# Altium PCB PCB1.PcbDoc
Units mm, origin at the board's own origin, x right, y up, seen from the top; angles counter-clockwise.
Board outline 30 x 60 mm, 4 copper layers (Top Layer, Layer 1, Layer 2, Bottom Layer), stack 1.588 mm thick; 62 components, 60 nets, 254 pads, 463 vias.
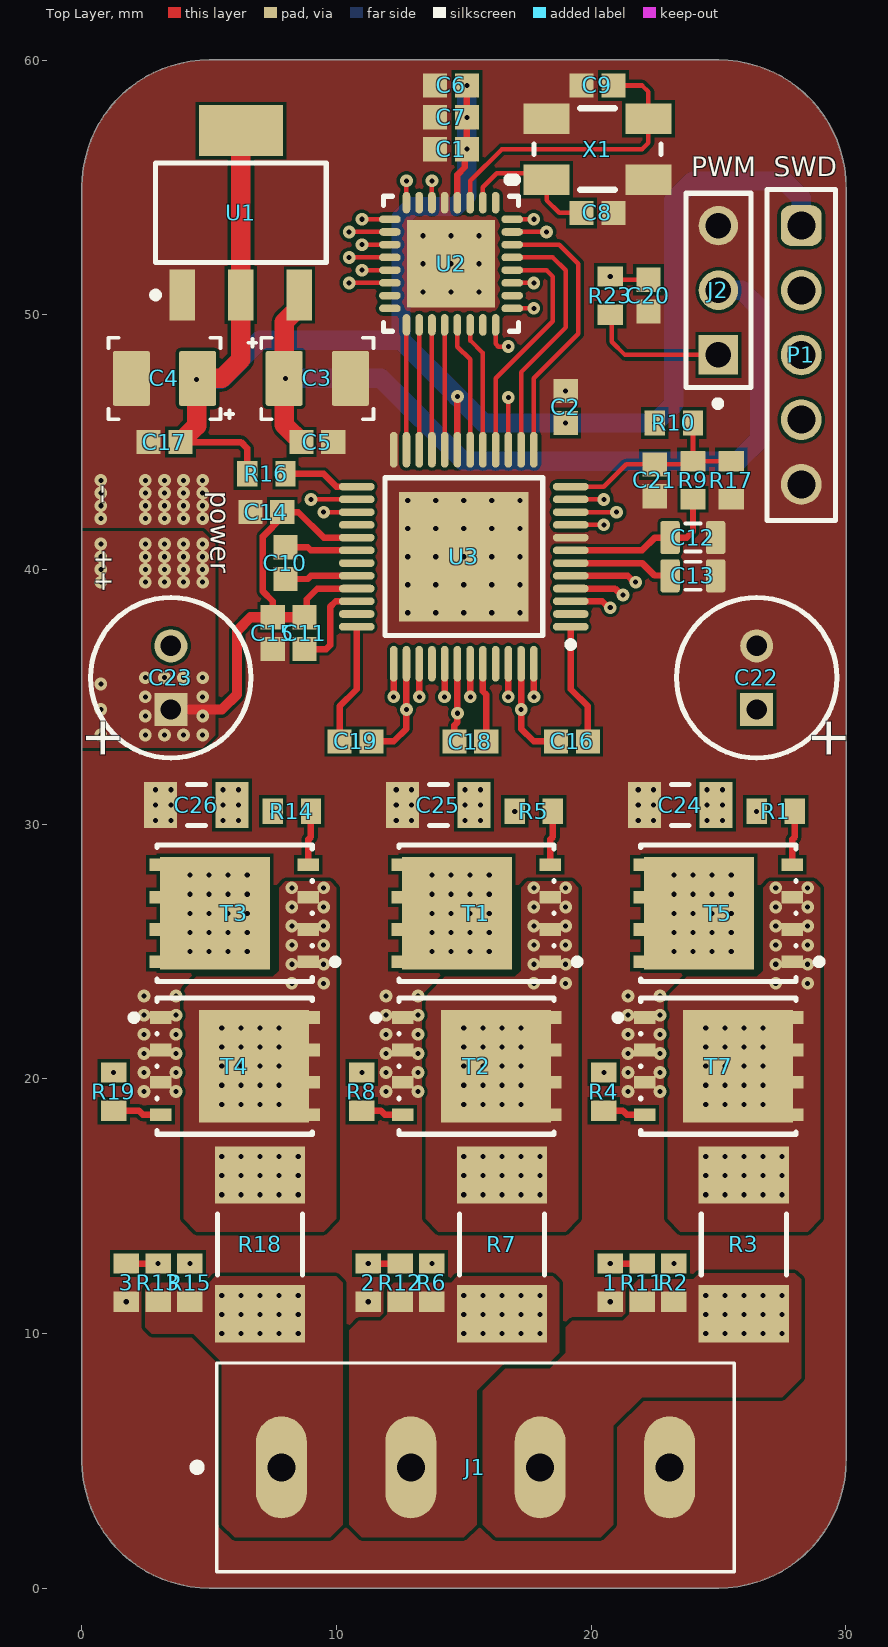
[diagram p0: Top Layer view]
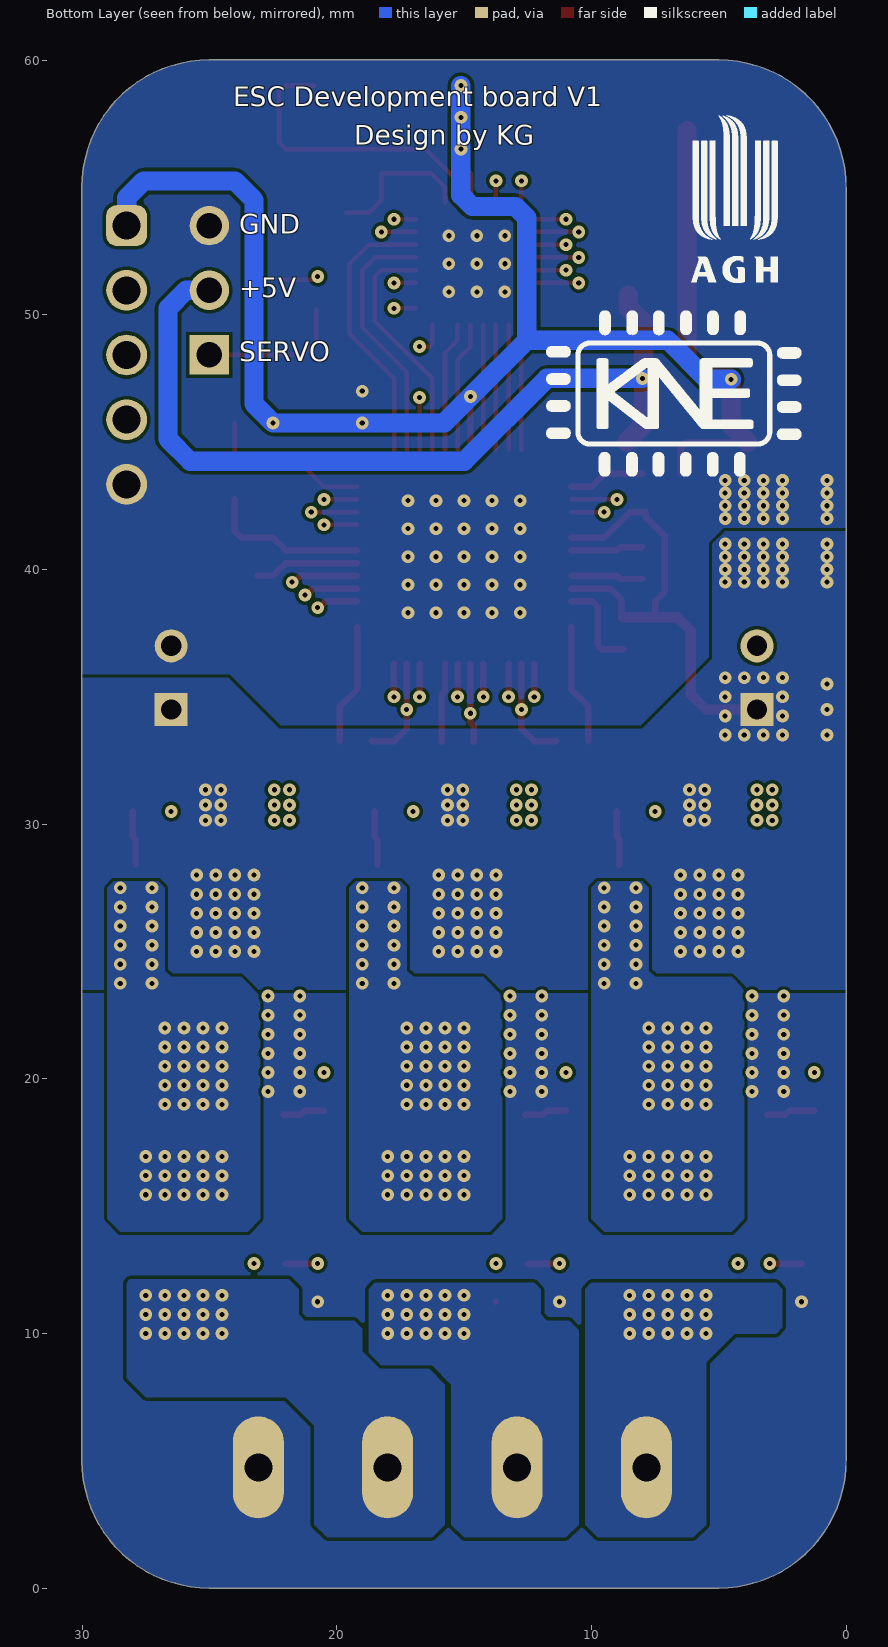
[diagram p1: Bottom Layer view, seen from below]
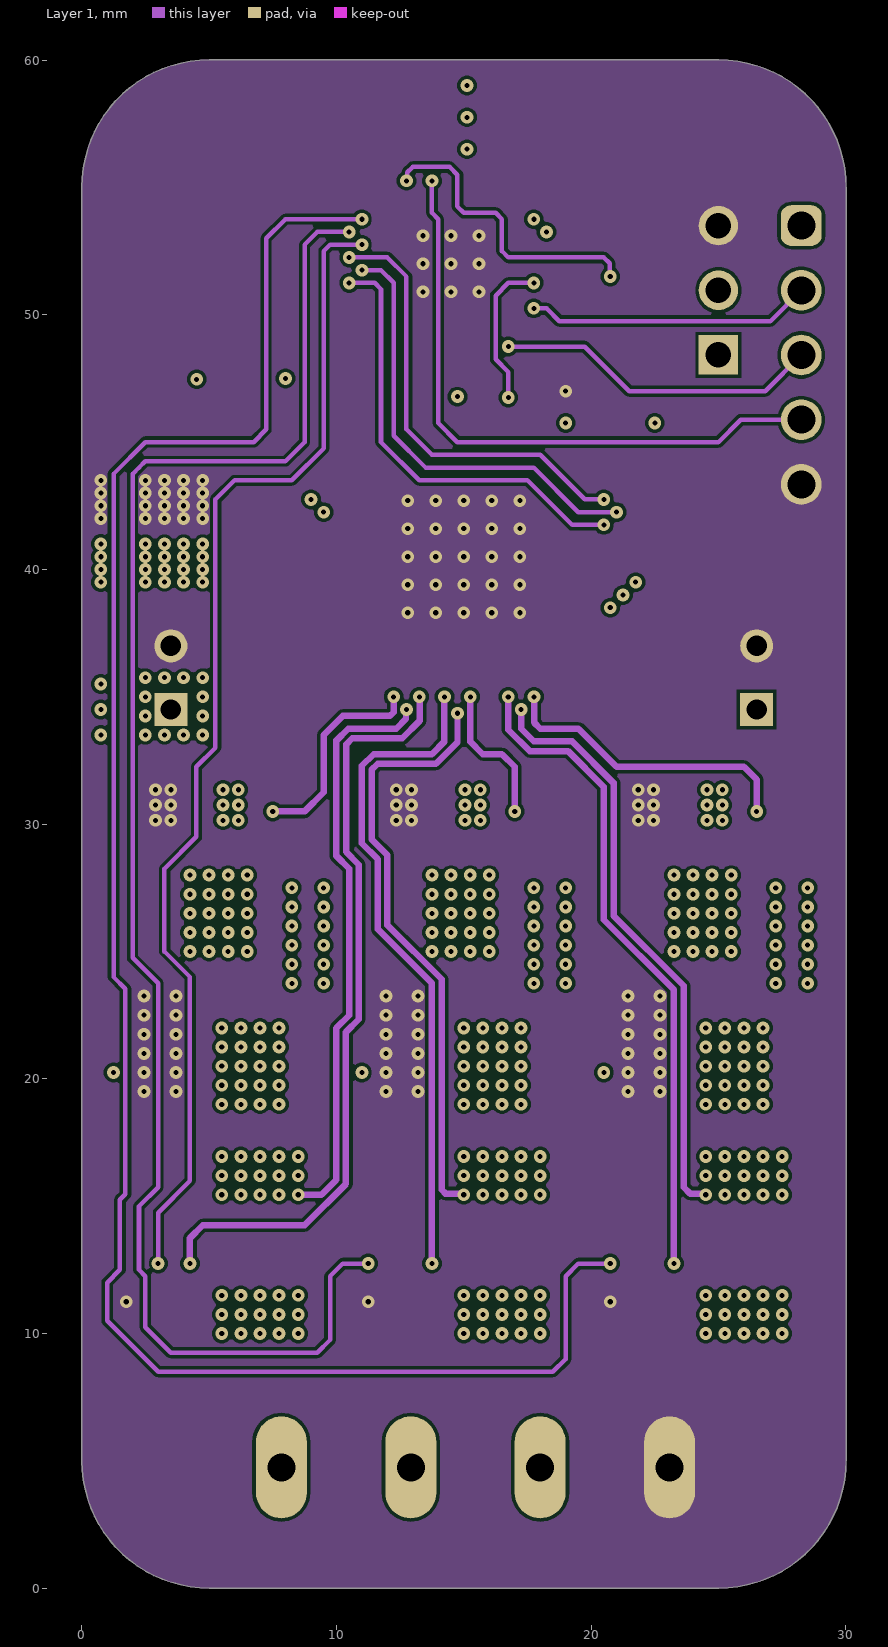
[diagram p2: Layer 1]
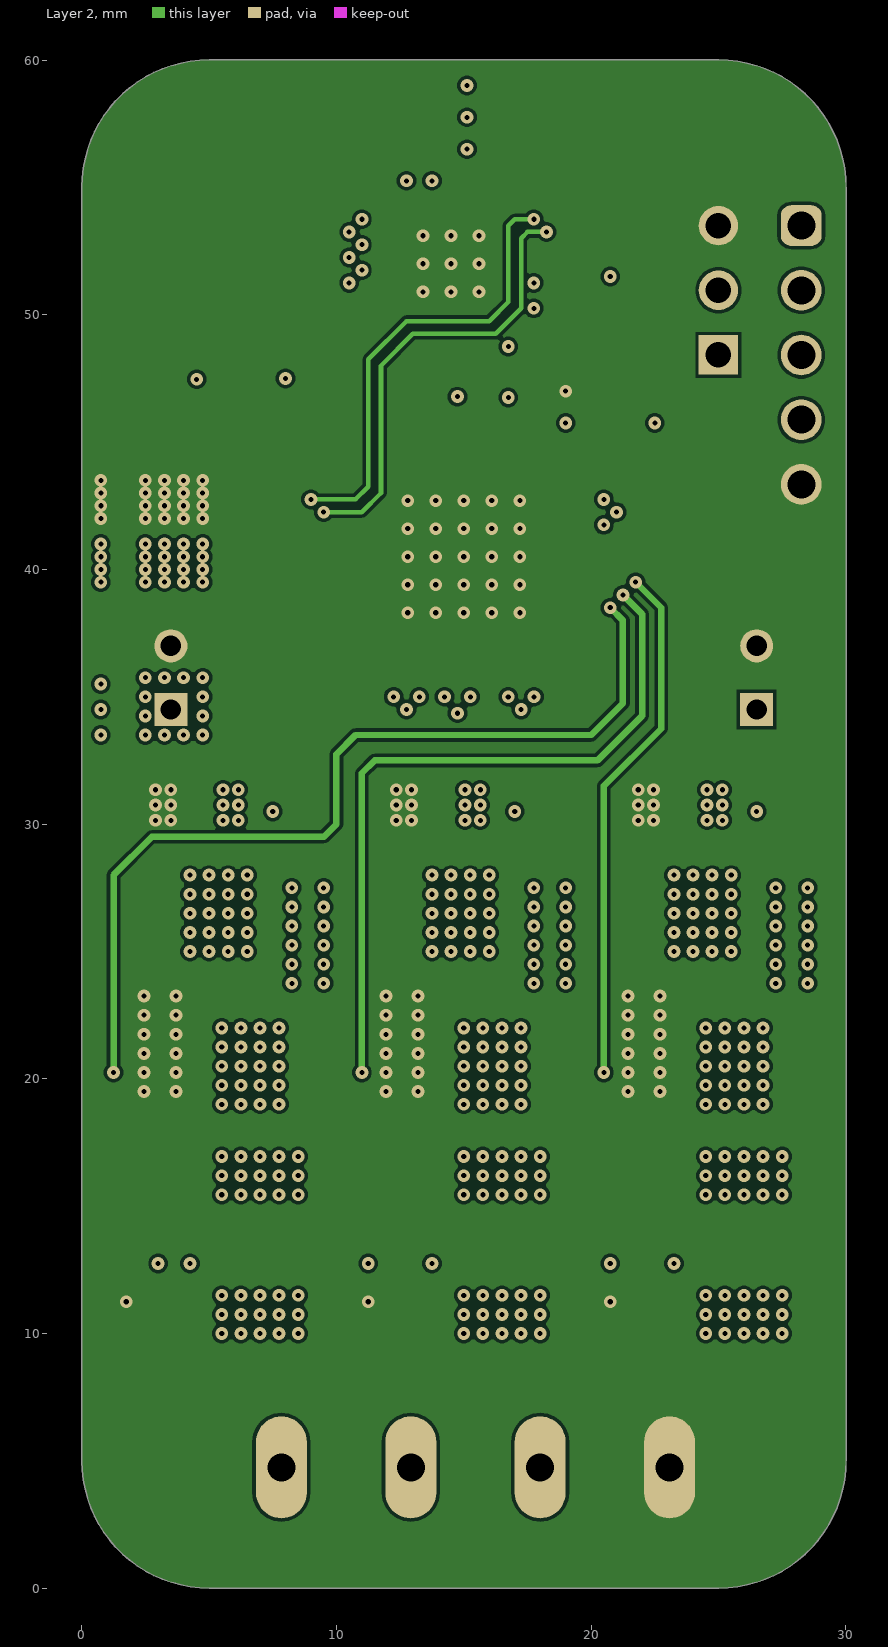
[diagram p3: Layer 2]
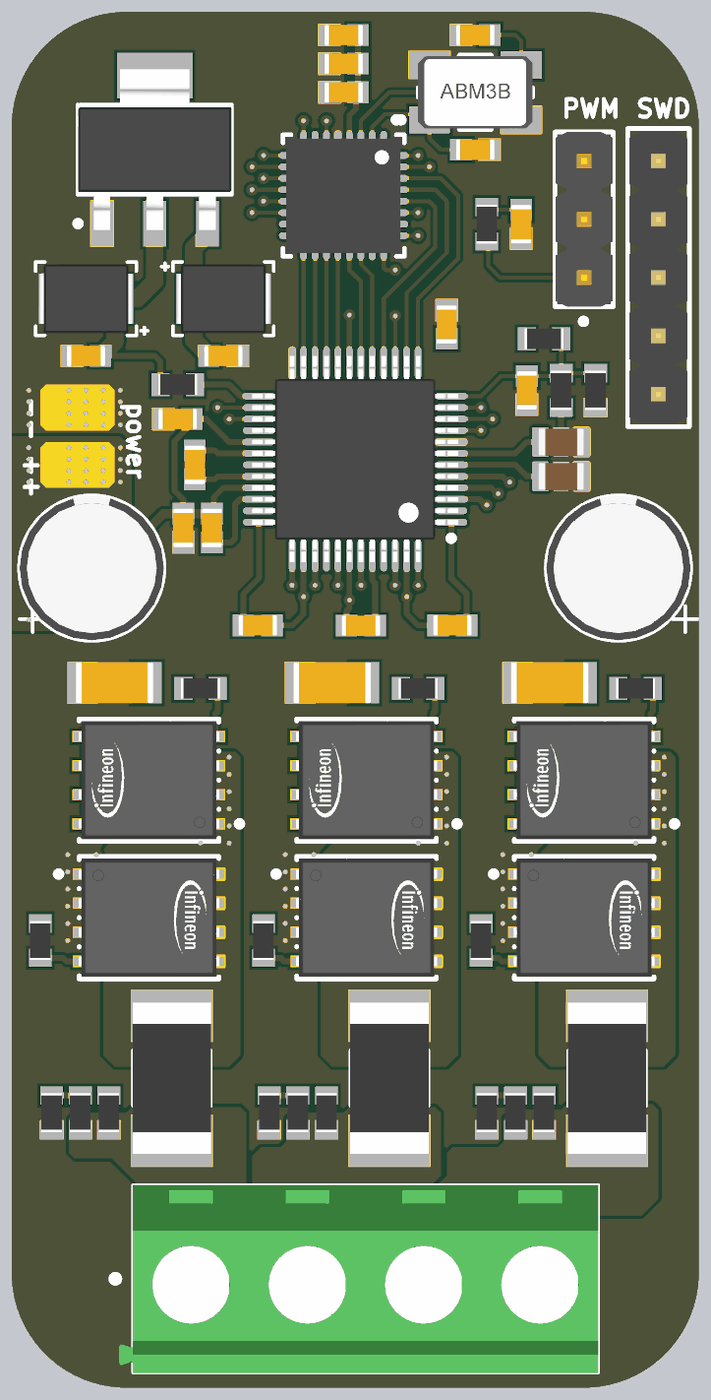
[diagram p4: 3D render of the assembled board from above, using the file's embedded part models]

## Layer stack, top to bottom
Top Solder: solder mask 0.0102, Solder Resist, Dk 3.5
Top Layer: signal copper 0.0356
Dielectric 2: prepreg 0.2083, PP-022, Dk 4.5
Layer 1: signal copper 0.0175
Dielectric 1: dielectric 1.065, FR-4, Dk 4.8
Layer 2: signal copper 0.0175
Dielectric 3: prepreg 0.2083, PP-022, Dk 4.5
Bottom Layer: signal copper 0.0356
Bottom Solder: solder mask 0.0102, Solder Resist, Dk 3.5

## Board outline
0.006,5.006 0.006,55.006 cw(c5.006,55.006) 5.006,60.006 25.006,60.006 cw(c25.006,55.006) 30.006,55.006 30.006,5.006 cw(c25.006,5.006) 25.006,0.006 5.006,0.006 cw(c5.006,5.006)

## Design rules (kind name [scope] priority, off if disabled: settings)
Clearance [All] p1: gap=0.127 ignorepadtopadclearanceinfootprint=TRUE
MinimumSolderMaskSliver [All] p1: minsoldermaskwidth=0.127
PlaneConnect [All] p1: planeconnectstyle=Direct reliefexpansion=0.508 reliefentries=4 reliefconductorwidth=0.254 reliefairgap=0.254
PolygonConnect [All] p1: connectstyle=Direct reliefconductorwidth=0.254 reliefentries=4 polygonreliefangle="90 Angle" airgapwidth=0.254
RoutingVias [All] p1: holewidth=0.711 width=1.27 viastyle="Through Hole" minholewidth=0.711 minwidth=1.27 maxholewidth=0.711 maxwidth=1.27
SilkToSilkClearance [All] p1: silktosilkclearance=0.127
SilkToSolderMaskClearance [IsPad] p1: minsilkscreentomaskgap=0.051 clearancetoexposedcopper=TRUE
SolderMaskExpansion SolderMaskExpansion_1 [isVia] p1: expansion=0.102 istentingtop=TRUE
SolderMaskExpansion [All] p2: expansion=0.025 istentingtop=FALSE
Width [All] p1: maxlimit=2.54 minlimit=0.127 preferedwidth=0.254
26 further rules are at their usual default settings.

## Classes and differential pairs
component class "Mosfet driver": 1 2 3 C10 C11 C12 C13 C14 C15 C16 C17 C18 C19 C21 C22 C23 C24 C25 C26 J1 R1 R2 R3 R4 R5 R6 R7 R8 R9 R10 R11 R12 R13 R14 R15 R16 R17 R18 R19 T1 T2 T3 T4 T5 T7 U3
component class MCU: C1 C2 C3 C4 C5 C6 C7 C8 C9 C20 J2 P1 R23 U1 U2 X1

## Components (designator, comment, footprint, x,y, rotation, side; value= is the part's Value field where it differs from the comment)
1 "R0603" RESC1608X04M 20.75,12 r90 top value=2k2
2 "R0603" RESC1608X04M 11.25,12 r90 top value=2k2
3 "R0603" RESC1608X04M 1.75,12 r90 top value=2k2
C1 "Capacitor 100 nF +/-10% 50 V 0603" CAPC1608X90X40NL10T20 14.5,56.5 r0 top value=2.2uF
C2 "Capacitor 100 nF +/-10% 50 V 0603" CAPC1608X90X40NL10T20 19,46.375 r270 top value=100nF
C3 "Capacitor 150µF +/-20% 6.3V B2" PNSC-6TPE150MAZB_L 9.25,47.5 r0 top value=100µF
C4 "Capacitor 150µF +/-20% 6.3V B2" PNSC-6TPE150MAZB_L 3.25,47.5 r180 top value=100µF
C5 "Capacitor 100 nF +/-10% 50 V 0603" CAPC1608X90X40NL10T20 9.25,45 r180 top value=2.2uF
C6 "Capacitor 100 nF +/-10% 50 V 0603" CAPC1608X90X40NL10T20 14.5,59 r0 top value=2.2uF
C7 "Capacitor 100 nF +/-10% 50 V 0603" CAPC1608X90X40NL10T20 14.5,57.75 r0 top value=10nF
C8 "Capacitor 100 nF +/-10% 50 V 0603" CAPC1608X90X40NL10T20 20.25,54 r0 top value=10pf
C9 "Capacitor 100 nF +/-10% 50 V 0603" CAPC1608X90X40NL10T20 20.25,59 r180 top value=10pf
C10 "Capacitor 100 nF +/-10% 50 V 0603" CAPC1608X90X40NL10T20 8,40.25 r90 top value=100nF
C11 "Capacitor 100 nF +/-10% 50 V 0603" CAPC1608X90X40NL10T20 8.75,37.5 r270 top value=100nF
C12 "Capacitor 22µF +/-40% 16V 0805" CAPC0805(2012)145_L 24,41.25 r0 top value=2.2µF
C13 "Capacitor 22µF +/-40% 16V 0805" CAPC0805(2012)145_L 24,39.75 r0 top value=2.2µF
C14 "Capacitor 100 nF +/-10% 50 V 0603" CAPC1608X90X40NL10T20 7.25,42.25 r0 top value=100nF
C15 "Capacitor 100 nF +/-10% 50 V 0603" CAPC1608X90X40NL10T20 7.5,37.5 r90 top value=100nF
C16 "Capacitor 100 nF +/-10% 50 V 0603" CAPC1608X90X40NL10T20 19.25,33.25 r0 top value=100nF
C17 "Capacitor 100 nF +/-10% 50 V 0603" CAPC1608X90X40NL10T20 3.25,45 r0 top value=100nF
C18 "Capacitor 100 nF +/-10% 50 V 0603" CAPC1608X90X40NL10T20 15.258,33.242 r0 top value=100nF
C19 "Capacitor 100 nF +/-10% 50 V 0603" CAPC1608X90X40NL10T20 10.75,33.25 r180 top value=100nF
C20 "Capacitor 100 nF +/-10% 50 V 0603" CAPC1608X90X40NL10T20 22.25,50.75 r90 top value=100nF
C21 "Capacitor 100 nF +/-10% 50 V 0603" CAPC1608X90X40NL10T20 22.5,43.5 r90 top value=100nF
C22 "ECA-1HM470" CAPPR55-250-1120X630X1220 26.5,35.75 r90 top value=220µF
C23 "ECA-1HM470" CAPPR55-250-1120X630X1220 3.5,35.75 r90 top value=220µF
C24 "Capacitor 10 uF +/- 10% 16 V 1206" CAPC3216X180X50NL20T25 23.5,30.75 r0 top value=10µF
C25 "Capacitor 10 uF +/- 10% 16 V 1206" CAPC3216X180X50NL20T25 14,30.75 r0 top value=10µF
C26 "Capacitor 10 uF +/- 10% 16 V 1206" CAPC3216X180X50NL20T25 4.5,30.75 r0 top value=10µF
J1 "282837-4" TE_282837-4 7.84,4.75 r0 top
J2 "90120-0763" FP-90120-0763-MFG 25,50.96 r90 top
P1 "61300511121" 61300511121 28.25,48.42 r270 top
R1 "R0603" RESC1608X04M 27.25,30.5 r0 top value=2r2
R2 "R0603" RESC1608X04M 23.25,12 r90 top value=10r
R3 "R2512" RESC6432X06M 26,13.5 r90 top value=0r01
R4 "R0603" RESC1608X04M 20.5,19.5 r270 top value=2r2
R5 "R0603" RESC1608X04M 17.75,30.5 r0 top value=2r2
R6 "R0603" RESC1608X04M 13.75,12 r90 top value=10r
R7 "R2512" RESC6432X06M 16.5,13.5 r90 top value=0r01
R8 "R0603" RESC1608X04M 11,19.5 r270 top value=2r2
R9 "R0603" RESC1608X04M 24,43.5 r90 top value=1k
R10 "R0603" RESC1608X04M 23.25,45.75 r0 top value=1k
R11 "R0603" RESC1608X04M 22,12 r270 top value=39k
R12 "R0603" RESC1608X04M 12.5,12 r270 top value=39k
R13 "R0603" RESC1608X04M 3,12 r270 top value=39k
R14 "R0603" RESC1608X04M 8.25,30.5 r0 top value=2r2
R15 "R0603" RESC1608X04M 4.25,12 r90 top value=10r
R16 "R0603" RESC1608X04M 7.25,43.75 r180 top value=2k2
R17 "R0603" RESC1608X04M 25.5,43.5 r270 top value=1k
R18 "R2512" RESC6432X06M 7,13.5 r90 top value=0r01
R19 "R0603" RESC1608X04M 1.25,19.5 r270 top value=2r2
R23 "R0603" RESC1608X04M 20.75,50.75 r90 top value=2k2
T1 "BSC072N08NS5ATMA1" FP-PG-TDSON-8-MFG 15.5,26.5 r90 top
T2 "BSC072N08NS5ATMA1" FP-PG-TDSON-8-MFG 15.5,20.5 r270 top
T3 "BSC072N08NS5ATMA1" FP-PG-TDSON-8-MFG 6,26.5 r90 top
T4 "BSC072N08NS5ATMA1" FP-PG-TDSON-8-MFG 6,20.5 r270 top
T5 "BSC072N08NS5ATMA1" FP-PG-TDSON-8-MFG 25,26.5 r90 top
T7 "BSC072N08NS5ATMA1" FP-PG-TDSON-8-MFG 25,20.5 r270 top
U1 "LD1117S33TR" STM-SOT-223_M 6.25,54 r90 top
U2 "STM32C031K4U6" QFN50P500X500X60_HS-33N 14.5,52 r270 top
U3 "TMC6200-TA" TSQFP50P900X900X120_HS-49N 15,40.5 r180 top
X1 "8.000MHZ" ABRA-ABM3B_V 20.25,56.5 r0 top

## Footprints (in the part's own frame and the unit in brackets; to place one, negate y for a bottom-side part, rotate by r counter-clockwise, add the part's x,y. Pads: shape width x height; smd on the part's side, far side on the other; paste and mask are expansions set on the pad)
61300511121 [mm] "Pin Header, pitch 2.54 mm, THT, Vertical, single row, 5p"
  rrect50% 1.6x1.6 hole 1.1: 1(-5.08,0)
  round 1.6 hole 1.1: 2(-2.54,0) 3(0,0) 4(2.54,0) 5(5.08,0)
  silkscreen extent -6.5,-1.35 6.5,1.35, body extent -6.35,-1.27 6.35,1.27, height 8.57
ABRA-ABM3B_V [mm] "SMD, 4-Leads, Body 5x3.2mm"
  rect 1.8x1.2 smd: 1(-2,-1.2) 2(2,-1.2) 3(2,1.2) 4(-2,1.2)
  silkscreen extent -3.57,-1.6 2.5,1.6, body extent -2.5,-1.59 2.5,1.59, height 1.13
CAPC0805(2012)145_L [mm] "Chip Capacitor, Body 2.0x1.2mm, Height 1.45mm, IPC High Density"
  rrect25% 0.76x1.3 smd: 1(-0.9,0) 2(0.89,0)
  silkscreen extent -0.3,-0.55 0.3,0.55, body extent -1,-0.6 1,0.6, height 1.45
CAPC1608X90X40NL10T20 [mm] "Chip Capacitor, 2-Leads, Body 1.70x0.90mm, IPC Medium Density"
  rect 0.95x0.95 smd: 1(-0.625,0) 2(0.625,0)
  body extent -0.85,-0.45 0.85,0.45, height 0.9
CAPC3216X180X50NL20T25 [mm] "Chip Capacitor, 2-Leads, Body 3.40x1.80mm, IPC Medium Density"
  rect 1.3x1.8 smd: 1(-1.4,0) 2(1.4,0)
  silkscreen extent -0.35,-0.8 0.35,0.8, body extent -1.7,-0.9 1.7,0.9, height 1.8
CAPPR55-250-1120X630X1220 [mm] "THD, 2-Leads, Dia 6.3mm, Pin Spacing 2.5mm"
  rect 1.3x1.3 hole 0.8: 1(-1.25,0)
  round 1.3 hole 0.8: 2(1.25,0)
  silkscreen extent -3.15,-3.15 3.15,3.15, body extent -3.15,-3.15 3.16,3.15, height 12.21
FP-90120-0763-MFG [mm]
  rect 1.55x1.55 hole 1 paste-2539.97 mask+0: 1(-2.54,0)
  round 1.55 hole 1 paste-2539.97 mask+0: 2(0,0) 3(2.54,0)
  silkscreen extent -4.57,-1.27 3.81,1.27, body extent -3.81,-1.25 3.81,1.25, height 9.65
FP-PG-TDSON-8-MFG [mm]
  rect 0.5x0.85 smd paste-1000 mask+0: 1(-1.905,-2.9) 2(-0.635,-2.9) 3(0.635,-2.9) 4(1.905,-2.9) 5(1.905,2.921) 6(0.635,2.921) 7(-0.635,2.921) 8(-1.905,2.921)
  rect 4.41x4.318 smd paste-1000 mask-1000: 9(0,0.762)
  silkscreen extent -2.68,-4.08 2.68,3.05, body extent -3,-3.42 3,3.42, height 0.25
PNSC-6TPE150MAZB_L [mm] "Molded Capacitor, 2-Leads, Body 3.70x3mm, IPC High Density"
  rrect10% 1.45x2.15 smd: 1(-1.3,0) 2(1.3,0)
  silkscreen extent -2.7,-1.6 2.2,1.6, body extent -2.07,-1.5 2.07,1.5, height 2
QFN50P500X500X60_HS-33N [mm] "QFN, 32-Leads, Body 5,00x5,00mm, Pitch 0,50mm, Thermal Pad 3,45x3,45mm, IPC Medium Density"
  oval 0.85x0.3 smd: 1(-2.4,1.75) 2(-2.4,1.25) 3(-2.4,0.75) 4(-2.4,0.25) 5(-2.4,-0.25) 6(-2.4,-0.75) 7(-2.4,-1.25) 8(-2.4,-1.75) 17(2.4,-1.75) 18(2.4,-1.25) 19(2.4,-0.75) 20(2.4,-0.25) 21(2.4,0.25) 22(2.4,0.75) 23(2.4,1.25) 24(2.4,1.75)
  oval 0.3x0.85 smd: 9(-1.75,-2.4) 10(-1.25,-2.4) 11(-0.75,-2.4) 12(-0.25,-2.4) 13(0.25,-2.4) 14(0.75,-2.4) 15(1.25,-2.4) 16(1.75,-2.4) 25(1.75,2.4) 26(1.25,2.4) 27(0.75,2.4) 28(0.25,2.4) 29(-0.25,2.4) 30(-0.75,2.4) 31(-1.25,2.4) 32(-1.75,2.4)
  rect 3.45x3.45 smd: 33(0,0)
  silkscreen extent -3.42,-2.65 2.65,2.65, body extent -2.51,-2.51 2.51,2.51, height 0.6
RESC1608X04M [mm] "Chip Resistor, 2-Leads, Body 1,60x0,80mm, IPC Low Density"
  rect 0.8x1 smd: 1(-0.75,0) 2(0.75,0)
  body extent -0.85,-0.45 0.85,0.45, height 0.45
RESC6432X06M [mm] "Chip Resistor, 2-Leads, Body 6,35x3,18mm, IPC Low Density"
  rect 2.25x3.55 smd: 1(-2.725,0) 2(2.725,0)
  silkscreen extent -1.2,-1.68 1.2,1.68, body extent -3.3,-1.72 3.3,1.72, height 0.65
STM-SOT-223_M [mm] "SOT223, 4-Leads, Body 6.7x3.7mm, Pitch 2.3mm, IPC Low Density"
  rect 2x1 smd: 1(-3.225,2.3) 2(-3.225,0) 3(-3.225,-2.3)
  rect 2x3.3 smd: 4(3.225,0)
  silkscreen extent -3.35,-3.35 1.95,3.47, body extent -3.5,-3.35 3.5,3.35, height 1.8
TE_282837-4 [mm]
  oval 2x4 hole 1.1 mask+0.102: 1(0,0) 2(5.08,0) 3(10.16,0) 4(15.24,0)
  silkscreen extent -3.46,-4.1 17.78,4.1, body extent -3.14,-4.11 17.78,4.09, height 10
TSQFP50P900X900X120_HS-49N [mm] "TSQFP, 48-Leads, Body 7,00x7,00mm, Pitch 0,50mm, Thermal Pad 5,10x5,10mm, IPC Medium Density"
  oval 1.4x0.3 smd: 1(-4.2,2.75) 2(-4.2,2.25) 3(-4.2,1.75) 4(-4.2,1.25) 5(-4.2,0.75) 6(-4.2,0.25) 7(-4.2,-0.25) 8(-4.2,-0.75) 9(-4.2,-1.25) 10(-4.2,-1.75) 11(-4.2,-2.25) 12(-4.2,-2.75) 25(4.2,-2.75) 26(4.2,-2.25) 27(4.2,-1.75) 28(4.2,-1.25) 29(4.2,-0.75) 30(4.2,-0.25) 31(4.2,0.25) 32(4.2,0.75) 33(4.2,1.25) 34(4.2,1.75) 35(4.2,2.25) 36(4.2,2.75)
  oval 0.3x1.4 smd: 13(-2.75,-4.2) 14(-2.25,-4.2) 15(-1.75,-4.2) 16(-1.25,-4.2) 17(-0.75,-4.2) 18(-0.25,-4.2) 19(0.25,-4.2) 20(0.75,-4.2) 21(1.25,-4.2) 22(1.75,-4.2) 23(2.25,-4.2) 24(2.75,-4.2) 37(2.75,4.2) 38(2.25,4.2) 39(1.75,4.2) 40(1.25,4.2) 41(0.75,4.2) 42(0.25,4.2) 43(-0.25,4.2) 44(-0.75,4.2) 45(-1.25,4.2) 46(-1.75,4.2) 47(-2.25,4.2) 48(-2.75,4.2)
  rect 5.1x5.1 smd: 49(0,0)
  silkscreen extent -4.33,-3.1 3.1,3.57, body extent -4.5,-4.5 4.5,4.5, height 1.2

## Part data
1 2 3 R1 R2 R4 R5 R6 R8 R9 R10 R11 R12 R13 R14 R15 R16 R17 R19 R23: library part CMP-009-00179-11, "Resistor SMD 0603"
C1 C2 C5 C6 C7 C8 C9 C10 C11 C14 C15 C16 C17 C18 C19 C20 C21: library part CMP-001-00017-6, "Chip Capacitor, 100 nF, +/- 10%, 50 V, 0603 (1608 Metric)", Capacitor Type=Ceramic, Case/Package=0603, Max Operating Temperature=125°C, Min Operating Temperature=-55°C, Tolerance=10%, Voltage Rating=50V, Mounting Technology=SM, Pins=2, RoHS Compliant=True
C3 C4: library part CMP-001-00053-3, "Molded Tantalum Polymer Capacitor, 150 uF, +/- 20%, 6.3 V, -55 to 105 degC, 2-Pin SMD, RoHS, Tape and Reel", Case/Package=2917, Max Operating Temperature=105°C, Min Operating Temperature=-55°C, Tolerance=20%, Voltage Rating=6.3V, Mounting Technology=SMT, Pins=2
C12 C13: library part CMP-001-00081-4, "Chip Capacitor, 22µF +/-40%, 16V, 0805, Thickness 1.45 mm", Case/Package=0805, Max Operating Temperature=85°C, Min Operating Temperature=-55°C, Tolerance=5%, Voltage Rating=16V, Mounting Technology=SMT, Pins=2
C22 C23: library part CMP-001-00031-7, "Aluminum Electrolytic Capacitor, 47 uF, +/-20%, 50 V, -40 to 85 degC, 2-Pin THD, RoHS, Bulk", Capacitor Type=Electrolytic, Case/Package=Radial, Manufacturer=Panasonic, Max Operating Temperature=85°C, Min Operating Temperature=-40°C, Package Description="2-Pin Radial Lead, Dia 6.3 mm, Height 12.2 mm", Package Quantity=200, Package Reference=CAPPR55-250-1120X630X1220, Ripple Current=130mA, Tolerance=20%, Voltage Rating=50V, Datasheet URL=https://industrial.panasonic.com/cdbs/www-data/pdf/RDF0000/DMF0000COL72.pdf, Datasheet Version=Apr-16, Diameter=6.3mm, Lead Pitch=2.5mm, Manufacturer URL=http://www.panasonic.com/, Mounting Technology=TH, Packaging=Bulk, Pins=2, Ripple Current (AC)=130mA, RoHS Compliant=True
C24 C25 C26: library part CMP-001-00016-6, "Chip Capacitor, 10 uF, +/- 10%, 16 V, 1206 (3216 Metric)", Capacitor Type=Ceramic, Case/Package=1206, Max Operating Temperature=125°C, Min Operating Temperature=-55°C, Tolerance=10%, Voltage Rating=16V, Mounting Technology=SM, Pins=2, RoHS Compliant=True
J1: library part CMP-006-000000-5, "4 Position Wire to Board Terminal Block Horizontal with Board 0.200 (5.08mm) Through Hole", Package=None, Availability="In Stock", Check_prices=https://www.snapeda.com/parts/282837-4/TE+Connectivity+AMP+Connectors/view-part/?ref=eda, Component Type=Standard, Design Item ID=282837-4, EU_RoHS_Compliance="Compliant with Exemptions", MF="TE Connectivity", MP=282837-4, Pin Count=4, Price=None, Purchase-URL=https://pricing.snapeda.com/search/part/282837-4/?ref=eda, SnapEDA_Link=https://www.snapeda.com/parts/282837-4/TE+Connectivity+AMP+Connectors/view-part/?ref=snap, Source=282837-4.SchLib
J2: library part CMP-002-00071-1, "Board Connector, 3 Contact(s), 1 Row(s), Male, Straight, 0.1 inch Pitch, Solder Terminal, Black Insulator, Receptacle", Max Operating Temperature=125°C, Min Operating Temperature=-55°C, Connector Type="BOARD CONNECTOR", Mounting Technology=Board, RoHS Compliant=Yes
P1: library part CMP-002-00074-2, "Board Connector, 5 Contact(s), 1 Row(s), Male, Straight, 0.1 inch Pitch, Solder Terminal, Locking, Black Insulator, Plug", Max Operating Temperature=125°C, Min Operating Temperature=-40°C, Connector Type="BOARD CONNECTOR", Mounting Technology=Board, RoHS Compliant=Yes
R3 R7 R18: library part CMP-009-00181-2, "Resistor SMD 2512"
T1 T2 T3 T4 T5 T7: library part CMP-013-00034-5, "Power Field-Effect Transistor, 19A I(D), 80V, 0.0072ohm, 1-Element, N-Channel, Silicon, Metal-oxide Semiconductor FET", Avalanche Energy Rating (Eas)=40mJ, Case Connection=DRAIN, Drain Current-Max (ID)=19A, DS Breakdown Voltage-Min=80V, Pins=5, RoHS Compliant=Yes
U1: library part CMP-019-00019-3, "Low Drop Positive Voltage Regulator, 800 mA, Fixed 3.3 V Output, 0 to 125 degC, 3-Pin TO-220, RoHS, Tape and Reel", Case/Package=TO-261-4, Dropout Voltage=1.1V, Manufacturer=STMicroelectronics, Max Input Voltage=15V, Max Operating Temperature=125°C, Max Ouput Current=1.3A, Min Input Voltage=4.75V, Min Operating Temperature=0°C, Nominal Output Voltage=3.3V, Output Current=950mA, Package Description="4-Pin Small Outline Transistor, Body 6.5 x 3.5 mm, Pitch 2.3 mm", Package Quantity=2500, Package Reference=SOT-223, Power=12W, Datasheet URL=http://www.farnell.com/datasheets/1776449.pdf, Datasheet Version="Rev. 33, 11/2013", Manufacturer URL=http://www.st.com/, Max Supply Voltage=15V, Min Supply Voltage=4.75V, Mounting Technology=SM, Output Voltage=3.3V, Outputs=1, Packaging=TapeandReel, Pins=3, RoHS Compliant=True
U2: library part CMP-020-00024-2, "ARM Cortex-M0+ 32-bit MCU, 32 KB Flash, 12 KB RAM, 2 x USART, timers, ADC, comm. I/Fs, 2-3.6 V", Case/Package=UFQFPN32, Clock Frequency=48MHz, Nominal Supply Voltage=3.3V, I/Os=30, Mounting Technology=SMT
U3: library part CMP-00024-00007-2, "48-TQFP-EP（7x7）"
X1: library part CMP-003-00021-2, "Ceramic SMD Crystal, 8 MHz, +/- 20 ppm, 18 pF, -20 to 70 degC, 4-Pin SMD, RoHS, Tape and Reel", Case/Package=CSMD, Frequency=8MHz, Frequency Tolerance=20ppm, Load Capacitance=18pF, Manufacturer=Abracon, Max Operating Temperature=70°C, Min Operating Temperature=-20°C, Package Description="4-Pin Surface Mount Device, Body 5 x 3.2 mm", Package Quantity=1000, Package Reference=ABM3B, Resistance=200Ohm, Datasheet URL=http://www.abracon.com/Resonators/abm3b.pdf, Datasheet Version=Aug-15, ESR=200, Manufacturer URL=http://www.abracon.com/, Mounting Technology=SM, Packaging=TapeandReel, Pins=4, RoHS Compliant=True, Tolerance=20ppm

## Via types
v1: diameter 0.5, hole 0.2, Top Layer to Bottom Layer, tented both sides, 463 vias

## Nets (pads, with @x,y where several pads share a name; then routed paths per layer and width w, separated by ;. In a path a pad name is that pad's centre, name@x,y a point inside that pad or via, vN(x,y) a via of type N, cw(c..) or ccw(c..) an arc to the next point about the centre after c; other vN are vias at no path point)
+3V3: C1.2 C2.2 C4.1 C6.2 C7.2 C17.2 P1.1 R10.1 R16.2 U1.2 U1.4 U2.4 U3.19 | length 71.8
  Top Layer w0.254: C17.2 6.25,45 6.5,44.75 R16.2 ; U3.19 v1(14.75,46.786) ; U2.4 14.75,55.5 15.043,55.793 15.043,56.418 v1(15.125,56.5) v1(15.125,57.75) v1(15.125,59)
  Top Layer w0.762: C17.2 4.514,45.639 v1(4.514,47.464) ; C4.1 5.5,47.5 6.25,48.25 U1.2 U1.4
  Bottom Layer w0.762: v1(4.514,47.464) 5.464,47.464 7,49 12.536,49 ; v1(15.125,59) v1(15.125,57.75) v1(15.125,56.5) 15.125,54.696 14.679,54.25 12.982,54.25 12.536,53.804 12.536,49 ; P1.1@28.25,53.75 28.25,54.583 27.583,55.25 24,55.25 23.25,54.5 23.25,46.5 v1(22.5,45.75) v1(19,45.75) 15.786,45.75 v1(14.75,46.786) 12.536,49
+5V: C3.1 C5.2 J2.2 U1.3 | length 33.7
  Top Layer w0.762: U1.3 8.55,50.275 8.431,50.156 8.396,50.156 7.95,49.71 C3.1 7.95,45.675 C5.2
  Bottom Layer w0.762: v1(8,47.5) 11.75,47.5 15,44.25 25.75,44.25 26.625,45.125 26.625,50.25 25.915,50.96 J2.2
+5VM: C12.1 R9.1 U3.7 | length 6.4
  Top Layer w0.254: U3.7 22,40.75 22.488,41.238 23.088,41.238 C12.1 23.75,41.25 24,41.5 R9.1
+12VM: C13.1 U3.6 | length 4.1
  Top Layer w0.254: U3.6 22,40.25 22.488,39.762 23.088,39.762 C13.1
+VM: C11.1 C14.2 C15.2 C22.1 C23.1 C24.2 C25.2 C26.2 T1.5 T1.6 T1.7 T1.8 T1.9 T3.5 T3.6 T3.7 T3.8 T3.9 T5.5 T5.6 T5.7 T5.8 T5.9 U3.29 U3.33 | length 19
  Top Layer w0.254: C15.2 7.5,38.75 7.114,39.136 7.114,41.298 7.875,42.059 C14.2 8.5,42.25 9.5,41.25 U3.29 ; C11.1 8.835,38.21 8.835,38.832 9.244,39.241 10.791,39.241 U3.33
  Top Layer w0.4: C23.1 5.5,34.5 6.1,35.1 6.1,37.6 6.625,38.125 C15.2 C11.1
  other v1: 4.25,25 5,25 5.75,25 6.5,25 13.751,25.001 14.5,25 15.25,25 16,25 23.251,25.001 24,25 24.75,25 25.5,25 4.25,25.75 5,25.75 5.75,25.75 6.5,25.75 13.75,25.75 14.5,25.75 15.25,25.75 16,25.75 23.25,25.75 24,25.75 24.75,25.75 25.5,25.75 4.25,26.5 5,26.5 5.75,26.5 6.5,26.5 13.75,26.5 14.5,26.5 15.25,26.5 16,26.5 23.25,26.5 24,26.5 24.75,26.5 25.5,26.5 4.25,27.25 5,27.25 5.75,27.25 6.5,27.25 13.75,27.25 14.5,27.25 15.25,27.25 16,27.25 23.25,27.25 24,27.25 24.75,27.25 25.5,27.25 4.25,28 5,28 5.75,28 6.5,28 13.75,28 14.5,28 15.25,28 16,28 23.25,28 24,28 24.75,28 25.5,28 5.55,30.15 6.15,30.15 15.05,30.15 15.65,30.15 24.55,30.15 25.15,30.15 5.55,30.75 6.15,30.75 15.05,30.75 15.65,30.75 24.55,30.75 25.15,30.75 5.55,31.35 6.15,31.35 15.05,31.35 15.65,31.35 24.55,31.35 25.15,31.35 0.75,33.5 2.5,33.5 3.25,33.5 4,33.5 4.75,33.5 2.5,34.25 4.75,34.25 0.75,34.5 2.5,35 4.75,35 0.75,35.5 2.5,35.75 3.25,35.75 4,35.75 4.75,35.75 0.75,39.5 2.5,39.5 3.25,39.5 4,39.5 4.75,39.5 0.75,40 2.5,40 3.25,40 4,40 4.75,40 0.75,40.5 2.5,40.5 3.25,40.5 4,40.5 4.75,40.5 0.75,41 2.5,41 3.25,41 4,41 4.75,41
CAP_U: C16.2 U3.1 | length 4.8
  Top Layer w0.254: U3.1 19.2,35.3 19.875,34.625 C16.2
CAP_V: C18.2 U3.44 | length 3.1
  Top Layer w0.254: U3.44 15.75,35.221 15.883,35.088 C18.2
CAP_W: C19.2 U3.36 | length 4.8
  Top Layer w0.254: C19.2 10.125,34.625 10.8,35.3 U3.36
CS: U2.30 U3.13 | length 11.4
  Top Layer w0.127: U3.13@17.75,44.2 U3.13
  Top Layer w0.178: U2.30 18.75,52.75 19.5,52 19.5,49.25 17.75,47.5 U3.13
CUR_U: U2.12 U3.11 | length 20.3
  Top Layer w0.178: v1(10.5,52.25) U2.12 ; U3.11 v1(20.5,42.75)
  Layer 1 w0.178: v1(10.5,52.25) 12,52.25 12.75,51.5 12.75,45.5 13.75,44.5 18,44.5 19.75,42.75 v1(20.5,42.75)
CUR_V: U2.13 U3.10 | length 20.3
  Top Layer w0.178: v1(11,51.75) U2.13 ; U3.10 v1(21,42.25)
  Layer 1 w0.178: v1(11,51.75) 11.75,51.75 12.25,51.25 12.25,45.25 13.5,44 17.75,44 19.5,42.25 v1(21,42.25)
CUR_W: U2.14 U3.9 | length 20.3
  Top Layer w0.178: v1(10.5,51.25) U2.14 ; U3.9 v1(20.5,41.75)
  Layer 1 w0.178: v1(10.5,51.25) 11.5,51.25 11.75,51 11.75,45 13.25,43.5 17.5,43.5 19.25,41.75 v1(20.5,41.75)
EN: U2.31 U3.27 | length 20.5
  Top Layer w0.178: v1(9.5,42.25) U3.27 ; U2.31 v1(18.25,53.25)
  Layer 2 w0.178: v1(9.5,42.25) 11,42.25 11.75,43 11.75,48 13,49.25 16.25,49.25 17.25,50.25 17.25,53 17.5,53.25 v1(18.25,53.25)
FAULT: U2.32 U3.26 | length 20.6
  Top Layer w0.178: v1(9,42.75) U3.26 ; U2.32 v1(17.75,53.75)
  Layer 2 w0.178: v1(9,42.75) 10.75,42.75 11.25,43.25 11.25,48.25 12.75,49.75 16,49.75 16.75,50.5 16.75,53.5 17,53.75 v1(17.75,53.75)
GND: 1.1 2.1 3.1 C1.1 C2.1 C3.2 C4.2 C5.1 C6.1 C7.1 C8.2 C9.2 C12.2 C13.2 C14.1 C15.1 C17.1 C20.1 C21.1 C22.2 C23.2 C24.1 C25.1 C26.1 J1.4 J2.3 P1.5 R17.2 T2.1 T2.2 T2.3 T4.1 T4.2 T4.3 T7.1 T7.2 T7.3 U1.1 U2.5 U2.33 U3.8 U3.24 U3.49 X1.2 X1.4
  other v1: 1.75,11.25 11.25,11.25 20.75,11.25 2.45,19.5 3.7,19.5 11.95,19.5 13.2,19.5 21.45,19.5 22.7,19.5 2.45,20.25 3.7,20.25 11.95,20.25 13.2,20.25 21.45,20.25 22.7,20.25 2.45,21 3.7,21 11.95,21 13.2,21 21.45,21 22.7,21 2.45,21.75 3.7,21.75 11.95,21.75 13.2,21.75 21.45,21.75 22.7,21.75 2.45,22.5 3.7,22.5 11.95,22.5 13.2,22.5 21.45,22.5 22.7,22.5 2.45,23.25 3.7,23.25 11.95,23.25 13.2,23.25 21.45,23.25 22.7,23.25 2.9,30.15 3.5,30.15 12.35,30.15 12.95,30.15 21.85,30.15 22.45,30.15 2.9,30.75 3.5,30.75 12.35,30.75 12.95,30.75 21.85,30.75 22.45,30.75 2.9,31.35 3.5,31.35 12.35,31.35 12.95,31.35 21.85,31.35 22.45,31.35 12.8,38.3 13.9,38.3 15,38.3 16.1,38.3 17.2,38.3 12.8,39.4 13.9,39.4 15,39.4 16.1,39.4 17.2,39.4 12.8,40.5 13.9,40.5 15,40.5 16.1,40.5 17.2,40.5 12.8,41.6 13.9,41.6 15,41.6 16.1,41.6 17.2,41.6 0.75,42 2.5,42 3.25,42 4,42 4.75,42 0.75,42.5 2.5,42.5 3.25,42.5 4,42.5 4.75,42.5 12.8,42.7 13.9,42.7 15,42.7 16.1,42.7 17.2,42.7 0.75,43 2.5,43 3.25,43 4,43 4.75,43 0.75,43.5 2.5,43.5 3.25,43.5 4,43.5 4.75,43.5 19,47 13.4,50.9 14.5,50.9 15.6,50.9 13.4,52 14.5,52 15.6,52 13.4,53.1 14.5,53.1 15.6,53.1
HS_U: R1.1 U3.48 | length 13.2
  Top Layer w0.254: U3.48 17.753,36.297 17.753,35.003 v1(17.756,35)
  Layer 1 w0.254: v1(17.756,35) 17.758,34.998 17.758,33.992 18,33.75 19.5,33.75 21,32.25 26,32.25 26.5,31.75 v1(26.5,30.5)
HS_V: R5.1 U3.43 | length 7
  Top Layer w0.254: U3.43 15.254,36.296 15.254,35.004 v1(15.258,35)
  Layer 1 w0.254: v1(15.258,35) 15.258,33.242 15.75,32.75 16.5,32.75 17,32.25 v1(17,30.5)
HS_W: R14.1 U3.37 | length 9.6
  Top Layer w0.254: v1(12.246,35) 12.248,35.002 12.248,36.298 U3.37
  Layer 1 w0.254: v1(7.5,30.5) 8.75,30.5 9.5,31.25 9.5,33.5 10.25,34.25 12.097,34.25 12.246,34.399 v1(12.246,35)
LS_U: R4.1 U3.5 | length 23.2
  Top Layer w0.254: U3.5 21.433,39.75 21.683,39.5 v1(21.75,39.5)
  Layer 2 w0.254: v1(20.5,20.25) 20.5,31.5 22.75,33.75 22.75,38.5 v1(21.75,39.5)
LS_V: R8.1 U3.4 | length 30.9
  Top Layer w0.254: U3.4 20.933,39.25 21.183,39 v1(21.25,39)
  Layer 2 w0.254: v1(11,20.25) 11,32 11.5,32.5 20.25,32.5 22,34.25 22,38.25 v1(21.25,39)
LS_W: R19.1 U3.3 | length 37.8
  Top Layer w0.254: U3.3 20.433,38.75 20.683,38.5 v1(20.75,38.5)
  Layer 2 w0.254: v1(1.25,20.25) 1.25,28 2.75,29.5 9.5,29.5 10,30 10,32.75 10.75,33.5 20,33.5 21.25,34.75 21.25,38 v1(20.75,38.5)
MISO: U2.28 U3.16 | length 9.4
  Top Layer w0.178: U3.16 16.25,47.5 18.5,49.75 18.5,51.5 18.25,51.75 U2.28
MOSI: U2.27 U3.15 | length 8.8
  Top Layer w0.178: U3.15 v1(16.75,46.75) ; U2.27 17,51.25 v1(17.75,51.25)
  Layer 1 w0.178: v1@16.75,46.765 16.75,47.75 16.25,48.25 16.25,50.75 16.75,51.25 v1(17.75,51.25)
MOT_U: J1.3 R2.1 R3.1 R11.2
  other v1: 24.5,10 25.25,10 26,10 26.75,10 27.5,10 24.5,10.75 25.25,10.75 26,10.75 26.75,10.75 27.5,10.75 24.5,11.5 25.25,11.5 26,11.5 26.75,11.5 27.5,11.5
MOT_V: J1.2 R6.1 R7.1 R12.2 | length 0
  other v1: 15,10 15.75,10 16.5,10 17.25,10 18,10 15,10.75 15.75,10.75 16.5,10.75 17.25,10.75 18,10.75 15,11.5 15.75,11.5 16.5,11.5 17.25,11.5 18,11.5
MOT_W: J1.1 R13.2 R15.1 R18.1
  other v1: 5.5,10 6.25,10 7,10 7.75,10 8.5,10 5.5,10.75 6.25,10.75 7,10.75 7.75,10.75 8.5,10.75 5.5,11.5 6.25,11.5 7,11.5 7.75,11.5 8.5,11.5
NetC10_1: C10.1 U3.32 | length 2.9
  Top Layer w0.254: C10.1 8.875,39.625 9,39.75 U3.32
NetC10_2: C10.2 U3.30 | length 2.9
  Top Layer w0.254: C10.2 8.875,40.875 9,40.75 U3.30
NetC11_2: C11.2 U3.34 | length 3.7
  Top Layer w0.254: C11.2 9.601,36.875 9.75,37.024 9.75,38.527 9.973,38.75 U3.34
NetC21_2: C21.2 R9.2 R10.2 R17.1 U3.12 | length 8.2
  Top Layer w0.178: U3.12 20.5,43.25 21.375,44.125 C21.2 23.875,44.125 R9.2 ; R10.2 R9.2 ; R17.1 R9.2
NetJ2_1: J2.1 R23.1 | length 5.8
  Top Layer w0.178: R23.1@20.813,50.217 20.813,48.937 21.33,48.42 J2.1@25.1,48.42
NetR1_2: R1.2 T5.4 | length 2.1
  Top Layer w0.254: T5.4 27.9,29.4 28,29.5 R1.2
NetR4_2: R4.2 T7.4 | length 1.7
  Top Layer w0.254: R4.2 21.25,18.75 21.405,18.595 T7.4
NetR5_2: R5.2 T1.4 | length 2.1
  Top Layer w0.254: T1.4 18.4,29.4 18.5,29.5 R5.2
NetR8_2: R8.2 T2.4 | length 1.7
  Top Layer w0.254: R8.2 11.75,18.75 11.905,18.595 T2.4
NetR14_2: R14.2 T3.4 | length 2.1
  Top Layer w0.254: T3.4 8.9,29.4 9,29.5 R14.2
NetR16_1: R16.1 U3.25 | length 3
  Top Layer w0.254: R16.1 9.5,43.75 10,43.25 U3.25
NetR19_2: R19.2 T4.4 | length 1.9
  Top Layer w0.254: R19.2 2.25,18.75 2.405,18.595 T4.4
NRST: P1.4 U2.6 | length 25.4
  Top Layer w0.178: U2.6 v1(13.75,55.258)
  Layer 1 w0.178: v1(13.75,55.258) 13.75,54 14,53.75 14,45.75 14.75,45 25,45 25.88,45.88 P1.4
OSC_IN: C8.1 U2.2 X1.1 | length 6
  Top Layer w0.178: U2.2 15.75,55 16.3,55.55 18.25,55.55 18.25,54.5 18.75,54 C8.1
OSC_OUT: C9.1 U2.3 X1.3 | length 11.9
  Top Layer w0.178: U2.3 15.259,54.409 15.259,55.259 16.5,56.5 22,56.5 22.25,56.75 X1.3 22.25,58.75 22,59 C9.1
SCK: U2.29 U3.14 | length 10.1
  Top Layer w0.178: U2.29 18.5,52.25 19,51.75 19,49.5 17.25,47.75 U3.14
SENSE_U: R2.2 U3.46 | length 27.1
  Top Layer w0.254: v1(16.748,35) v1(16.748,35) U3.46 U3.46
  Layer 1 w0.254: v1(16.748,35) 16.75,34.998 16.75,33.711 17.592,32.869 19.092,32.869 20.5,31.461 20.5,26.25 23.25,23.5 v1(23.25,12.75)
SENSE_V: R6.2 U3.41 | length 27.4
  Top Layer w0.254: v1(14.246,35) v1(14.246,35) 14.248,36.298 U3.41
  Layer 1 w0.254: v1(13.75,12.75) 13.75,23.75 11.619,25.881 11.619,28.631 11,29.25 11,32.289 11.461,32.75 11.75,32.75 13.75,32.75 14.242,33.242 14.242,34.996 v1(14.246,35)
SENSE_W: R15.2 U3.39 | length 31.2
  Top Layer w0.254: U3.39 13.25,35.004 v1(13.254,35)
  Layer 1 w0.254: v1(4.25,12.75) 4.25,13.75 4.75,14.25 8.75,14.25 10.375,15.875 10.375,21.836 10.881,22.342 10.881,28.408 10.381,28.908 10.381,33.131 10.619,33.369 12.582,33.369 13.264,34.051 13.264,34.99 v1(13.254,35)
SERVO: C20.2 R23.2 U2.8 | length 14.4
  Top Layer w0.178: U2.8 v1(12.75,55.258) ; v1(20.75,51.5) 20.875,51.375 C20.2
  Layer 1 w0.178: v1(12.75,55.258) 12.787,55.295 12.787,55.597 12.991,55.801 14.449,55.801 14.75,55.5 14.75,54.25 15,54 16.25,54 16.5,53.75 16.5,52.5 16.75,52.25 20.5,52.25 20.733,52.017 20.733,51.517 v1(20.75,51.5)
SWCLK: P1.2 U2.25 | length 12.1
  Top Layer w0.178: U2.25 v1(17.75,50.25)
  Layer 1 w0.178: v1(17.75,50.25) 18.25,50.25 18.75,49.75 27.04,49.75 P1.2
SWDIO: P1.3 U2.24 | length 14.1
  Top Layer w0.178: U2.24 16.25,48.854 16.354,48.75 v1(16.75,48.75)
  Layer 1 w0.178: v1(16.75,48.75) 19.75,48.75 21.5,47 26.83,47 P1.3
U: C16.1 R3.2 T5.1 T5.2 T5.3 T7.5 T7.6 T7.7 T7.8 T7.9 U3.47 | length 27.4
  Top Layer w0.254: U3.47 17.252,36.298 17.252,34.502 v1(17.254,34.5) 17.25,34.496 17.25,33.75 17.75,33.25 C16.1
  Layer 1 w0.254: v1(17.254,34.5) 17.254,33.746 17.75,33.25 19.25,33.25 20.881,31.619 20.881,26.408 23.631,23.658 23.631,15.75 23.884,15.497 24.453,15.497 v1(24.5,15.45)
  other v1: 25.25,15.45 26,15.45 26.75,15.45 27.5,15.45 24.5,16.2 25.25,16.2 26,16.2 26.75,16.2 27.5,16.2 24.5,16.95 25.25,16.95 26,16.95 26.75,16.95 27.5,16.95 24.5,19 25.25,19 26,19 26.75,19 24.5,19.75 25.25,19.75 26,19.75 26.75,19.75 24.5,20.5 25.25,20.5 26,20.5 26.75,20.5 24.5,21.25 25.25,21.25 26,21.25 26.75,21.25 24.5,22 25.25,22 26,22 26.75,22 27.25,23.75 28.5,23.75 27.25,24.5 28.5,24.5 27.25,25.25 28.5,25.25 27.25,26 28.5,26 27.25,26.75 28.5,26.75 27.25,27.5 28.5,27.5
U_H: U2.22 U3.17 | length 5.1
  Top Layer w0.178: U2.22 15.263,49.587 15.263,48.987 15.75,48.5 U3.17
U_L: U2.21 U3.18 | length 5.1
  Top Layer w0.178: U2.21 14.75,48.75 15.25,48.25 U3.18
V: C18.1 R7.2 T1.1 T1.2 T1.3 T2.5 T2.6 T2.7 T2.8 T2.9 U3.42 | length 26.6
  Top Layer w0.254: C18.1 14.625,33.25 14.625,33.875 14.75,34 14.75,34.35 v1(14.754,34.354) ; v1@14.75,34.354 U3.42
  Layer 1 w0.254: v1(14.754,34.354) 14.754,33.215 13.908,32.369 11.619,32.369 11.381,32.131 11.381,29.408 12,28.789 12,26.039 14.131,23.908 14.131,15.646 14.28,15.497 14.953,15.497 v1(15,15.45)
  other v1: 15.75,15.45 16.5,15.45 17.25,15.45 18,15.45 15,16.2 15.75,16.2 16.5,16.2 17.25,16.2 18,16.2 15,16.95 15.75,16.95 16.5,16.95 17.25,16.95 18,16.95 15,19 15.75,19 16.5,19 17.25,19 15,19.75 15.75,19.75 16.5,19.75 17.25,19.75 15,20.5 15.75,20.5 16.5,20.5 17.25,20.5 15,21.25 15.75,21.25 16.5,21.25 17.25,21.25 15,22 15.75,22 16.5,22 17.25,22 17.75,23.75 19,23.75 17.75,24.5 19,24.5 17.75,25.25 19,25.25 17.75,26 19,26 17.75,26.75 19,26.75 17.75,27.5 19,27.5
V_H: U2.20 U3.20 | length 4.9
  Top Layer w0.178: U3.20 U2.20
V_L: U2.19 U3.21 | length 4.9
  Top Layer w0.178: U3.21 U2.19
VOLT_U: 1.2 R11.1 U2.9 | length 78.6
  Top Layer w0.178: v1(11,53.75) U2.9
  Top Layer w0.254: v1(20.75,12.75) R11.1
  Layer 1 w0.178: v1(11,53.75) 8,53.75 7.25,53 7.25,45.5 6.75,45 2.5,45 1.25,43.75 1.25,24 1.716,23.534 1.716,15.466 1.5,15.25 1.5,12.5 1,12 1,10.5 3,8.5 18.5,8.5 19,9 19,12.25 19.5,12.75 v1(20.75,12.75)
VOLT_V: 2.2 R12.1 U2.10 | length 66.2
  Top Layer w0.178: v1(10.5,53.25) U2.10
  Top Layer w0.254: v1(11.25,12.75) R12.1
  Layer 1 w0.178: v1(10.5,53.25) 9.25,53.25 8.75,52.75 8.75,45 8,44.25 2.5,44.25 2.25,44 2,43.75 2,24.75 3,23.75 3,15.75 2.25,15 2.25,12.5 2.5,12.25 2.5,10.25 3.5,9.25 9.25,9.25 9.75,9.75 9.75,12.25 10.25,12.75 v1(11.25,12.75)
VOLT_W: 3.2 R13.1 U2.11 | length 48.5
  Top Layer w0.178: v1(11,52.75) U2.11
  Top Layer w0.254: 3.2 v1(3,12.75)
  Layer 1 w0.178: v1@3,12.765 3,14.75 4.25,16 4.25,24 3.25,25 3.25,28.25 4.5,29.5 4.5,32.25 5.25,33 5.25,42.75 6,43.5 8.25,43.5 9.5,44.75 9.5,52.5 9.75,52.75 v1(11,52.75)
W: C19.1 R18.2 T3.1 T3.2 T3.3 T4.5 T4.6 T4.7 T4.8 T4.9 U3.38 | length 27
  Top Layer w0.254: C19.1 12.25,33.25 12.75,33.75 v1(12.75,34.5) U3.38
  Layer 1 w0.254: v1(8.5,15.45) 9.411,15.45 9.994,16.033 9.994,21.994 10.5,22.5 10.5,28.25 10,28.75 10,33.289 10.461,33.75 12.348,33.75 12.732,34.134 12.732,34.482 v1(12.75,34.5)
  other v1: 5.5,15.45 6.25,15.45 7,15.45 7.75,15.45 5.5,16.2 6.25,16.2 7,16.2 7.75,16.2 8.5,16.2 5.5,16.95 6.25,16.95 7,16.95 7.75,16.95 8.5,16.95 5.5,19 6.25,19 7,19 7.75,19 5.5,19.75 6.25,19.75 7,19.75 7.75,19.75 5.5,20.5 6.25,20.5 7,20.5 7.75,20.5 5.5,21.25 6.25,21.25 7,21.25 7.75,21.25 5.5,22 6.25,22 7,22 7.75,22 8.25,23.75 9.5,23.75 8.25,24.5 9.5,24.5 8.25,25.25 9.5,25.25 8.25,26 9.5,26 8.25,26.75 9.5,26.75 8.25,27.5 9.5,27.5
W_H: U2.18 U3.22 | length 4.9
  Top Layer w0.178: U3.22 U2.18
W_L: U2.17 U3.23 | length 4.9
  Top Layer w0.178: U3.23 U2.17
pads on no net: U2.1 U2.7 U2.15 U2.16 U2.23 U2.26 U3.2 U3.28 U3.31 U3.35 U3.40 U3.45

## Polygon pours and split planes (outlines as drawn)
GND on Top Layer "GND_L01_P021" (solid, pour order 21): 0.006,5.006 0.006,55.006 cw(c5.006,55.006) 5.006,60.006 25.006,60.006 cw(c25.006,55.006) 30.006,55.006 30.006,5.006 cw(c25.006,5.006) 25.006,0.006 5.006,0.006 cw(c5.006,5.006)
+VM on Top Layer "+VM_L01_P014" (solid, pour order 14): 5.25,41 4.75,41.5 0.006,41.5 0.006,33 4.75,33 5.25,33.5
MOT_U on Top Layer "MOT_U_L01_P010" (solid, pour order 10): 19,9.25 19,10.25 19.25,10.5 21.25,10.5 21.5,10.75 21.5,11.75 21.875,12.125 24,12.125 24.25,12.375 28,12.375 28.25,12.125 28.25,8.25 27.5,7.5 22,7.5 20.875,6.375 20.875,2.5 20.375,2 16.25,2 15.75,2.5 15.75,7.75 16.625,8.625 18.375,8.625
W on Top Layer "W_L01_P011" (solid, pour order 11): 7.75,27.5 8,27.75 9.75,27.75 10,27.5 10,14.5 9.5,14 4.5,14 4,14.5 4,18 4,23.5 4.5,24 7.5,24 7.75,24.25
V on Top Layer "V_L01_P012" (solid, pour order 12): 17.25,27.5 17.5,27.75 19.25,27.75 19.5,27.5 19.5,14.5 19,14 14,14 13.5,14.5 13.5,18 13.5,23.25 14.25,24 17,24 17.25,24.25
U on Top Layer "U_L01_P013" (solid, pour order 13): 26.75,27.5 27,27.75 28.75,27.75 29,27.5 29,14.5 28.5,14 23.5,14 23,14.5 23,18 23,23.25 23.75,24 26.5,24 26.75,24.25
MOT_V on Top Layer "MOT_V_L01_P009" (solid, pour order 9): 10.5,9.125 10.5,10.125 10.875,10.5 11.75,10.5 12,10.75 12,11.75 12.25,12 14.5,12 14.75,12.25 18.5,12.25 18.75,12 18.75,9.25 18.375,8.875 16.625,8.875 15.5,7.75 15.5,2.5 15,2 11,2 10.5,2.5
MOT_W on Top Layer "MOT_W_L01_P005" (solid, pour order 5): 5,12 2.75,12 2.5,11.75 2.5,10.25 2.75,10 4.375,10 5.5,8.875 5.5,2.5 6,2 9.75,2 10.25,2.5 10.25,12 10,12.25 5.25,12.25
GND on Bottom Layer "GND_L04_P017" (solid, pour order 17): 0.006,5.006 0.006,55.006 cw(c5.006,55.006) 5.006,60.006 25.006,60.006 cw(c25.006,55.006) 30.006,55.006 30.006,5.006 cw(c25.006,5.006) 25.006,0.006 5.006,0.006 cw(c5.006,5.006)
+VM on Bottom Layer "+VM_L04_P008" (solid, pour order 8): 8,33.75 5.25,36.5 5.25,41 4.75,41.5 0.006,41.5 0.006,23.5 30.006,23.5 30.006,35.75 24.25,35.75 22.25,33.75
MOT_W on Bottom Layer "MOT_W_L04_P004" (solid, pour order 4): 5,12 2.75,12 2.5,11.75 2.5,10.25 2.75,10 4.375,10 5.5,8.875 5.5,2.5 6,2 9.75,2 10.25,2.5 10.25,11.75 10,12
W on Bottom Layer "W_L04_P002" (solid, pour order 2): 7.75,27.5 8,27.75 9.75,27.75 10,27.5 10,14.5 9.5,14 4.5,14 4,14.5 4,18 4,23.5 4.5,24 7.5,24 7.75,24.25
V on Bottom Layer "V_L04_P001" (solid, pour order 1): 17.25,27.5 17.5,27.75 19.25,27.75 19.5,27.5 19.5,14.5 19,14 14,14 13.5,14.5 13.5,18 13.5,23.25 14.25,24 17,24 17.25,24.25
MOT_U on Bottom Layer "MOT_U_L04_P007" (solid, pour order 7): 19,9.313 19,10.194 19.306,10.5 21.25,10.5 21.5,10.75 21.5,11.75 21.875,12.125 24,12.125 28.125,12.125 28.25,12 28.25,8.25 27.5,7.5 22,7.5 20.875,6.375 20.875,2.5 20.375,2 16.25,2 15.75,2.5 15.75,8 16.375,8.625 18.313,8.625
MOT_V on Bottom Layer "MOT_V_L04_P006" (solid, pour order 6): 10.5,9.125 10.5,10.125 10.875,10.5 11.75,10.5 12,10.75 12,11.75 12.25,12 14.5,12 18.5,12 18.75,11.75 18.75,9.25 18.25,8.75 16.25,8.75 15.5,8 15.5,2.5 15,2 11,2 10.5,2.5
U on Bottom Layer "U_L04_P003" (solid, pour order 3): 26.75,27.5 27,27.75 28.75,27.75 29,27.5 29,14.5 28.5,14 23.5,14 23,14.5 23,18 23,23.25 23.75,24 26.5,24 26.75,24.25
no net on Top Solder "NONET_L01_P020" (solid): 4.5,42 4.25,41.75 1.5,41.75 1.25,42 1.25,43.5 1.5,43.75 4.25,43.75 4.5,43.5
no net on Top Solder "NONET_L01_P020" (solid, pour order 20): 4.5,39.5 4.25,39.25 1.5,39.25 1.25,39.5 1.25,41 1.5,41.25 4.25,41.25 4.5,41
GND on Layer 1 "GND_L02_P018" (solid, pour order 18): 0.006,5.006 0.006,55.006 cw(c5.006,55.006) 5.006,60.006 25.006,60.006 cw(c25.006,55.006) 30.006,55.006 30.006,5.006 cw(c25.006,5.006) 25.006,0.006 5.006,0.006 cw(c5.006,5.006)
GND on Layer 2 "GND_L03_P019" (solid, pour order 19): 0.006,5.006 0.006,55.006 cw(c5.006,55.006) 5.006,60.006 25.006,60.006 cw(c25.006,55.006) 30.006,55.006 30.006,5.006 cw(c25.006,5.006) 25.006,0.006 5.006,0.006 cw(c5.006,5.006)

## Silkscreen, mask and mechanical layers (free items; w line width, h text height)
Top Overlay:
  text "PWM" at 23.928,55.428 h0.76
  text "SWD" at 27.178,55.428 h0.76
  text "--" at 0.547,43.322 h0.76 r270
  text "power" at 5.064,43.072 h0.76 r270
  text "++" at 0.551,40.822 h0.76 r270
Bottom Overlay:
  drawing of 36 lines, arcs and shapes, not listed
  text "ESC Development board V1" at 24.072,58.182 h0.76
  text "Design by KG" at 19.322,56.682 h0.76
  text "GND" at 23.822,53.178 h0.76
  text "+5V" at 23.822,50.678 h0.76
  text "SERVO" at 23.822,48.178 h0.76

## Text inside footprints (layer, text, board x,y; h text height)
C22: Top Overlay "+" at 30,32.5 h1.5 r90
C23: Top Overlay "+" at 1.5,32.5 h1.5 r90